# Altium PCB Central_Unit_AgOpenGPS.pcbdoc (part 1 of 4)
Units mm, origin at the board's own origin, x right, y up, seen from the top; angles counter-clockwise.
Board outline 200.19 x 122.57 mm, 2 copper layers (Top Layer, Bottom Layer); 278 components, 223 nets, 1042 pads, 421 vias.
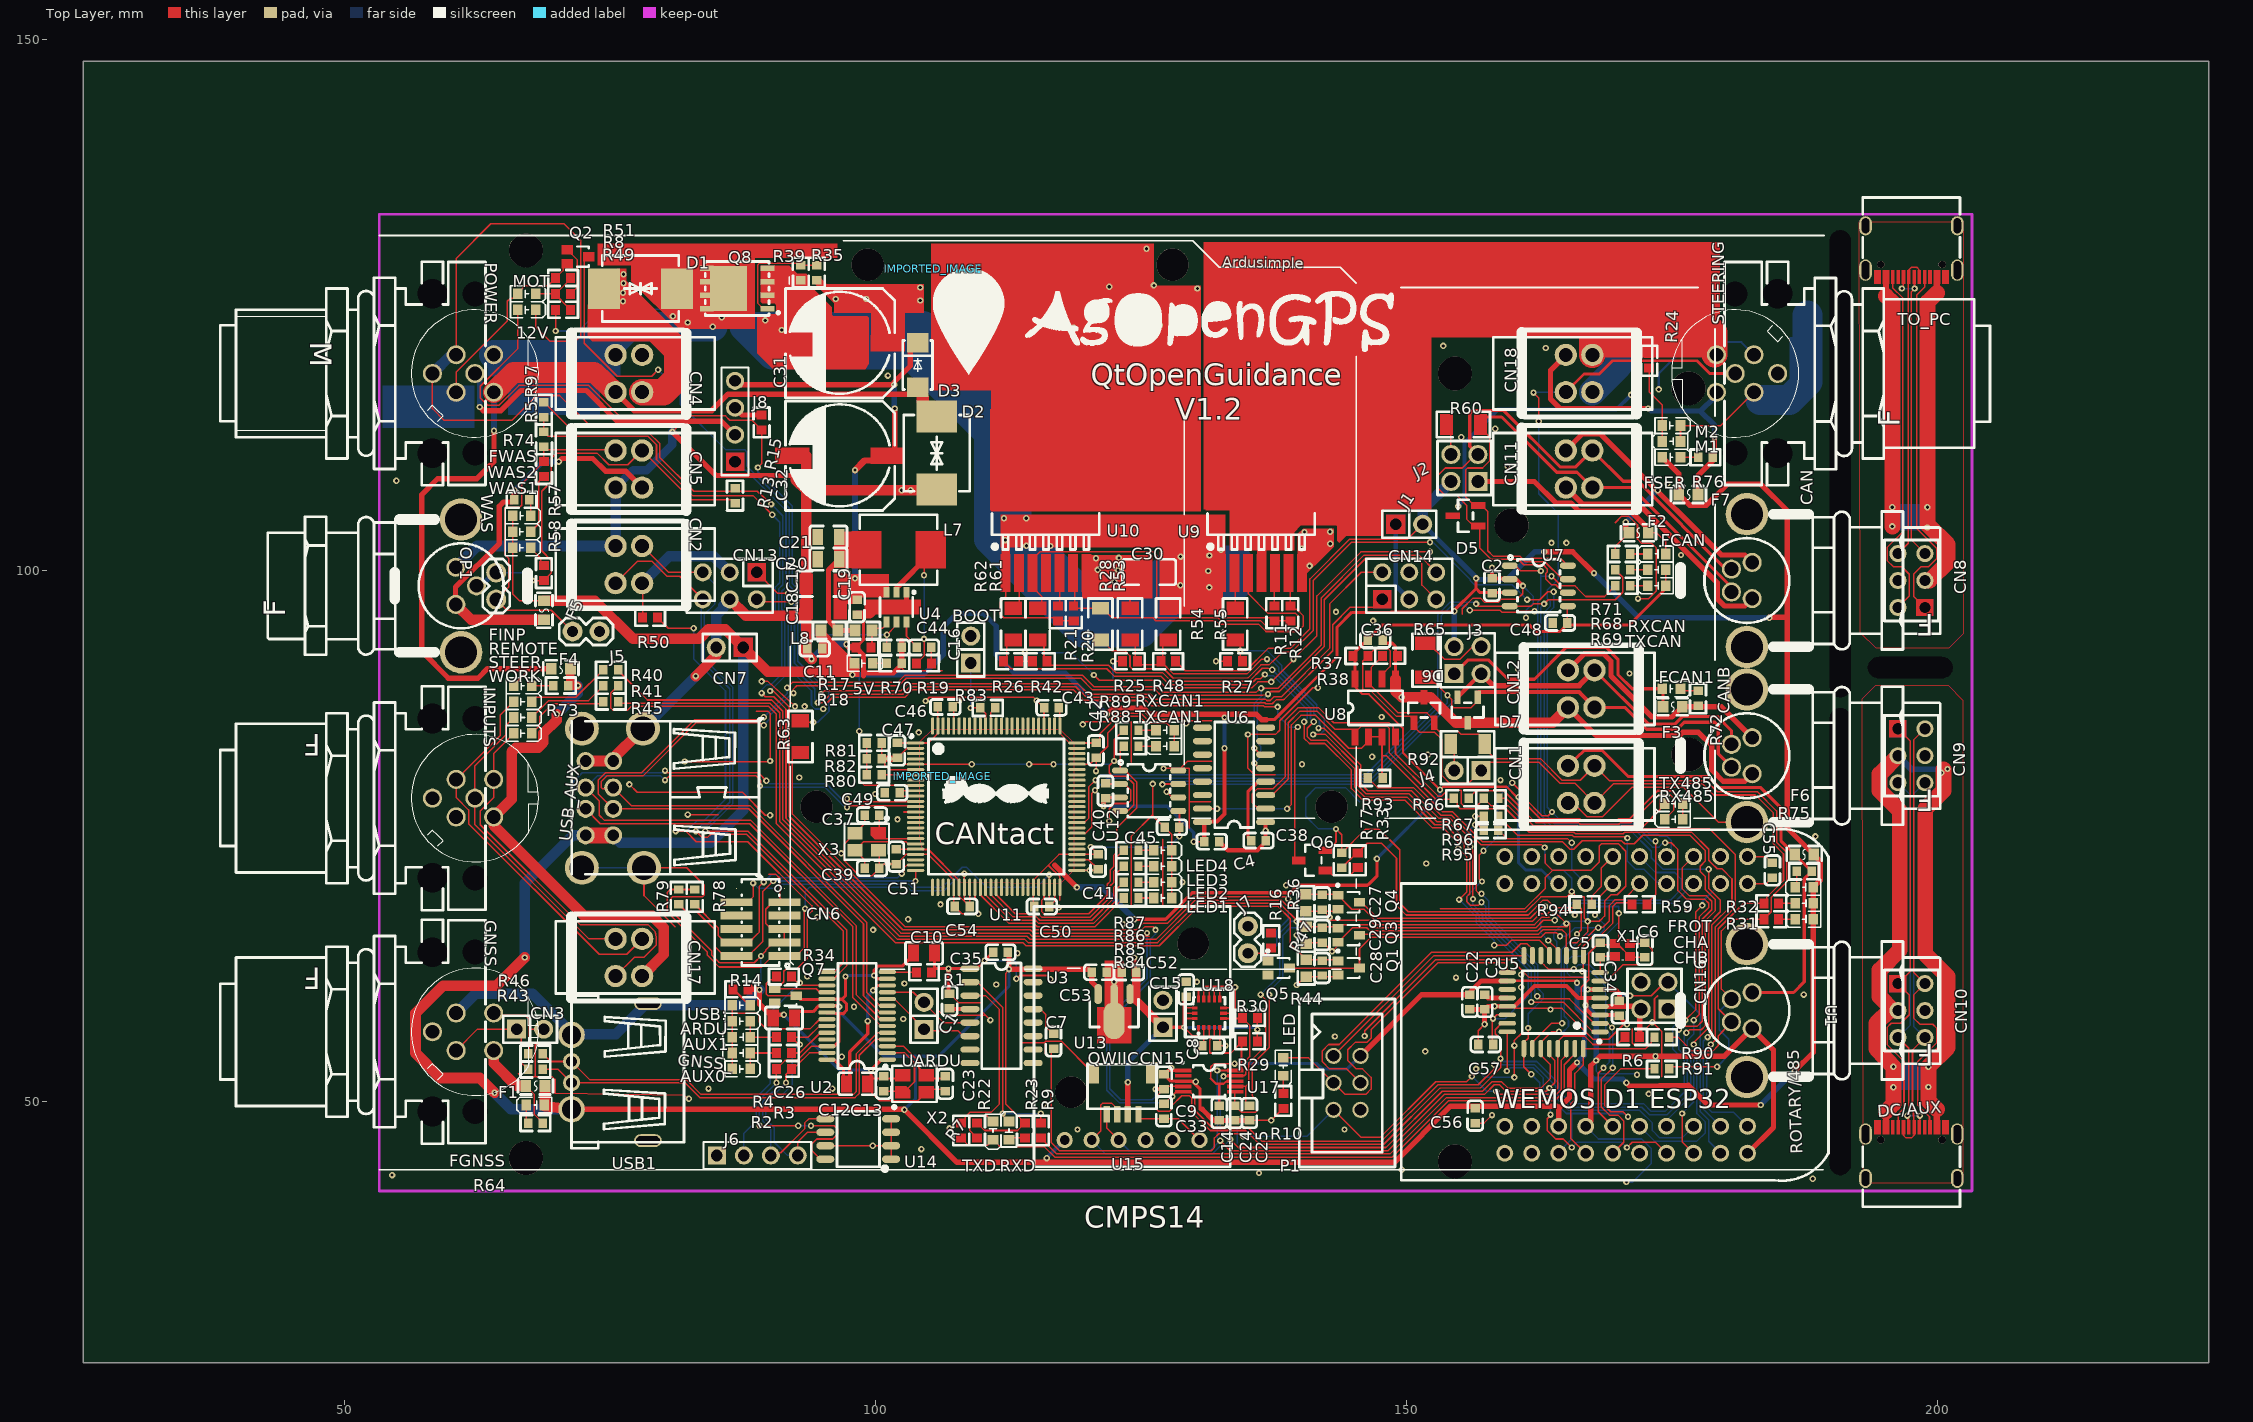
[diagram p0: Top Layer view]
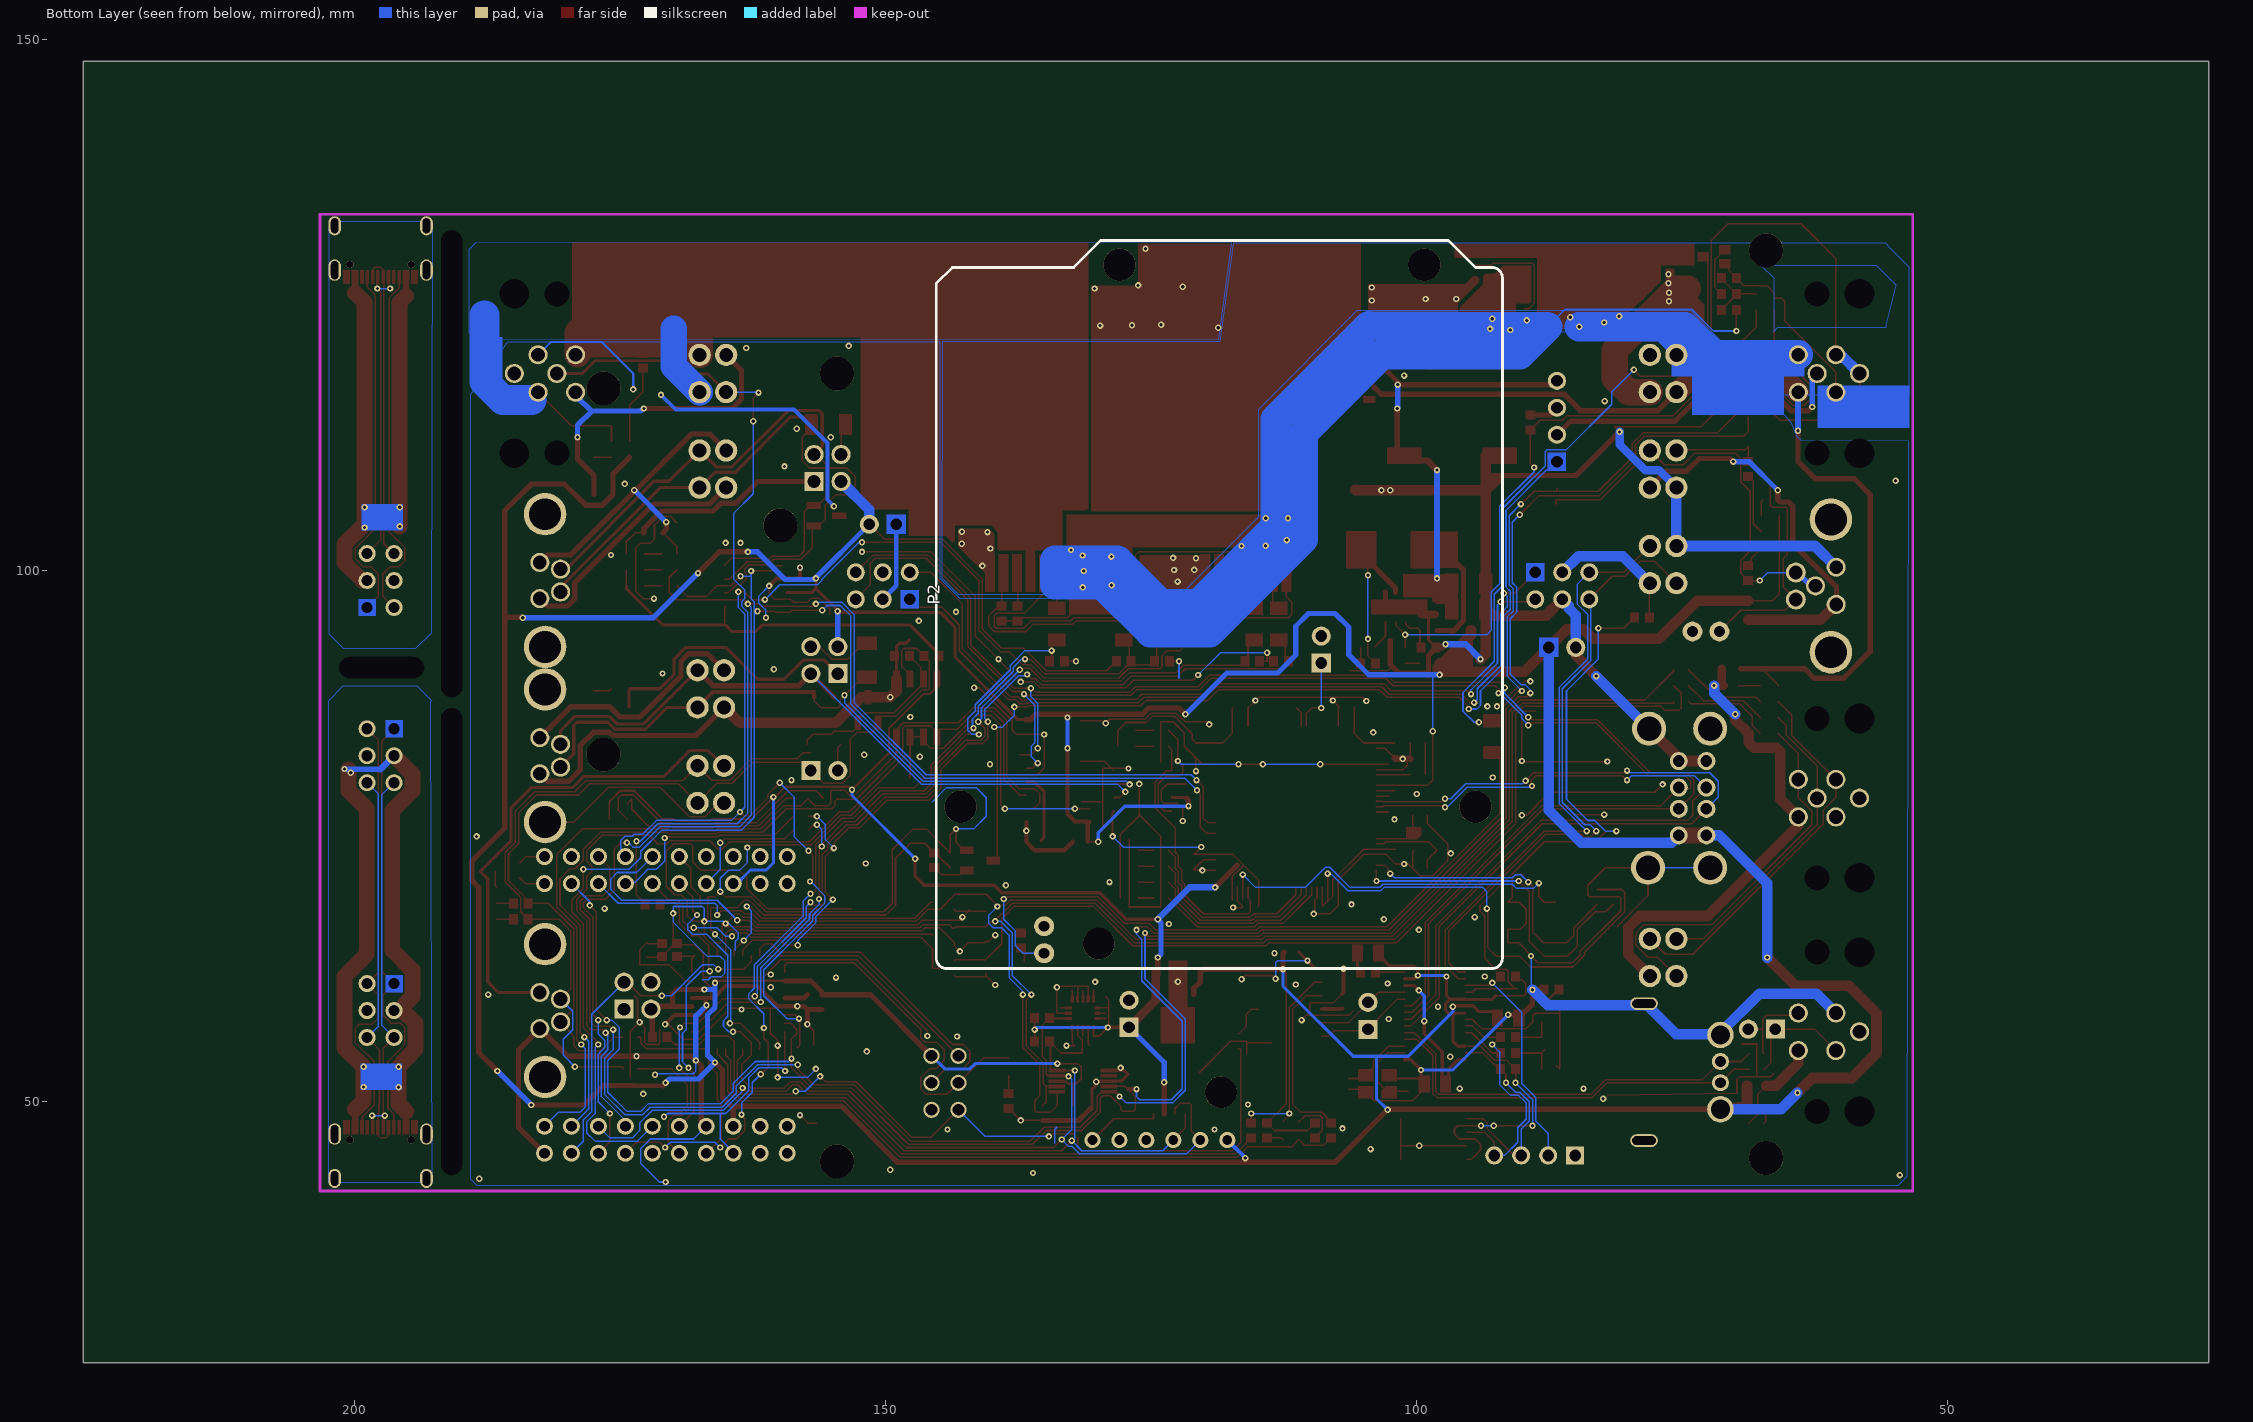
[diagram p1: Bottom Layer view, seen from below]

## Layer stack, top to bottom
Top Layer: signal copper (thickness not stored)
Dielectric: dielectric 0.32, FR-4, Dk 4.8
Bottom Layer: signal copper (thickness not stored)

## Board outline
225.587,25.4 25.4,25.4 25.4,147.973 225.587,147.973

## Components (designator, comment, footprint, x,y, rotation, side; value= is the part's Value field where it differs from the comment)
5V "FC-D1608WD-460H5" LED0603-RD 98.887,91.266 r180 top
12V "FC-D1608WD-460H5" LED0603-RD 67.187,124.566 r180 top
ARDU "FC-D1608UGK-520D10" LED0603-RD 87.387,57.566 r180 top
AUX0 "FC-D1608UGK-520D10" LED0603-RD 87.387,53.066 r180 top
AUX1 "FC-DA1608BK-470H10" LED0603-RD 87.387,56.066 r0 top
BOOT "A2541WV-2P" HDR-TH_P2.54-H-M_A2541WV-2P#1 108.987,92.566 r90 top
C1 "1uF" C0603 106.987,59.466 r270 top
C2 "1uF" C0603 158.087,98.566 r90 top
C3 "100nF" C0603 157.387,59.366 r270 top
C4 "100nF" C0603 131.687,74.466 r0 top
C5 "22pF" C0603 168.287,64.266 r270 top
C6 "22pF" C0603 172.487,64.266 r90 top
C7 "100nF" C0603 116.787,55.666 r90 top
C8 "100nF" C0603 131.487,55.266 r180 top
C9 "100nF" C0603 127.187,51.866 r270 top
C10 "10uF" C0805#1 104.587,63.966 r180 top
C11 "1uF" C0603 94.287,92.666 r180 top
C12 "10uF" C0805#1 98.287,51.666 r180 top
C13 "33pF" C0603 100.787,51.666 r270 top
C14 "1uF" C0603 132.387,48.916 r270 top
C15 "1uF" C0603 129.287,60.566 r90 top
C16 "100nF" C0603 104.587,92.766 r0 top
C17 "10uF" C1206 95.087,98.766 r0 top
C18 "10uF" C1206 95.087,96.366 r0 top
C19 "100nF" C0603 98.287,96.566 r90 top
C20 "22uF" C0805#2 95.587,101.066 r0 top
C21 "22uF" C0805#2 95.587,103.166 r0 top
C22 "1uF" C0603 155.987,59.366 r270 top
C23 "33pF" C0603 106.587,51.666 r270 top
C24 "1nF" C0603 133.839,48.917 r90 top
C25 "1nF" C0603 135.239,48.917 r90 top
C26 "10uF" C0805#1 91.387,57.866 r180 top
C27 "100nF" C0603 142.087,68.766 r90 top
C28 "100nF" C0603 142.087,62.566 r90 top
C29 "100nF" C0603 142.087,65.666 r90 top
C30 "10uF" C1206 125.787,99.866 r180 top
C31 "470uF" CAP-SMD_BD10.0-L10.3-W10.3-FD 96.687,121.416 r180 top
C32 "470uF" CAP-SMD_BD10.0-L10.3-W10.3-FD 96.687,110.816 r180 top
C33 "100nF" C0603 127.187,49.066 r90 top
C34 "1uF" C0603 170.087,58.766 r270 top
C35 "1uF" C0603 111.787,64.066 r180 top
C36 "1uF" C0603 147.087,93.466 r0 top
C37 "33pF" C0603 99.687,76.966 r0 top
C38 "100nF" C0603 136.087,74.566 r0 top
C39 "33pF" C0603 99.687,71.966 r180 top
C40 "1uF" C0603 121.687,79.266 r90 top
C41 "1uF" C0603 120.987,72.566 r90 top
C42 "1uF" C0603 120.787,83.066 r90 top
C43 "1uF" C0603 116.587,87.066 r0 top
C44 "100nF" C0603 101.787,92.766 r180 top
C45 "100nF" C0603 127.937,75.816 r0 top
C46 "1uF" C0603 106.587,87.166 r180 top
C47 "1uF" C0603 102.087,83.066 r90 top
C48 "100nF" C0603 164.487,95.066 r0 top
C49 "1uF" C0603 101.587,79.066 r0 top
C50 "1uF" C0603 115.687,68.366 r180 top
C51 "1uF" C0603 101.987,73.066 r90 top
C52 "1uF" C0603 123.887,62.166 r180 top
C53 "1uF" C0603 121.087,62.166 r0 top
C54 "1uF" C0603 108.187,68.366 r0 top
C55 "100nF" C0603 184.487,71.766 r270 top
C56 "1uF" C0603 156.487,48.666 r270 top
C57 "1nF" C0603 157.487,55.366 r0 top
CAN "M8 4pole female" "M8 FEMALE 4POLE 90°" 182.087,99.066 r90 top
CANB "M8 4pole female" "M8 FEMALE 4POLE 90°" 182.087,82.566 r90 top
CHA "FC-D1608HYK-588J" LED0603-RD 187.487,68.666 r0 top
CHB "FC-D1608HOK-600H" LED0603-RD 187.487,67.166 r0 top
CN1 "4x1 push_in connector" "S2C-SMT 3.50/04/180G 3.5SN BK RL" 166.487,79.866 r270 top
CN2 "4x1 push_in connector" "S2C-SMT 3.50/04/180G 3.5SN BK RL" 76.787,100.566 r90 top
CN3 "A2541WV-2P" HDR-TH_P2.54-H-M_A2541WV-2P#1 67.487,56.816 r0 top
CN4 "4x1 push_in connector" "S2C-SMT 3.50/04/180G 3.5SN BK RL" 76.787,118.566 r90 top
CN5 "4x1 push_in connector" "S2C-SMT 3.50/04/180G 3.5SN BK RL" 76.787,109.566 r90 top
CN6 "1315-1206G0M075CP01" HDR-SMD_12P-P1.27-V-M-R2-C6-S7.50 89.187,66.866 r90 top
CN7 "A2541WV-2P" HDR-TH_P2.54-H-M_A2541WV-2P#2 86.287,92.766 r180 top
CN8 "A2541WV-2X3P" HDR-TH_6P-P2.54-V-R2-C3-S2.54_A2541WV-2X3P 197.587,99.066 r90 top
CN9 "A2541WV-2X3P" HDR-TH_6P-P2.54-V-R2-C3-S2.54_A2541WV-2X3P 197.587,82.566 r270 top
CN10 "A2541WV-2X3P" HDR-TH_6P-P2.54-V-R2-C3-S2.54_A2541WV-2X3P 197.587,58.566 r270 top
CN11 "4x1 push_in connector" "S2C-SMT 3.50/04/180G 3.5SN BK RL" 166.287,109.566 r270 top
CN12 "4x1 push_in connector" "S2C-SMT 3.50/04/180G 3.5SN BK RL" 166.487,88.866 r270 top
CN13 "PM254V-12-06-H85" HDR-TH_6P-P2.54-V-F-R2-C3-S2.54 86.287,98.566 r180 top
CN14 "PM254V-12-06-H85" HDR-TH_6P-P2.54-V-F-R2-C3-S2.54 150.287,98.566 r0 top
CN15 "A2541WV-2P" HDR-TH_P2.54-H-M_A2541WV-2P#1 127.087,58.266 r90 top
CN16 "A2541WV-2X2P" HDR-TH_4P-P2.54-V-R2-C2-S2.54_A2541WV-2X2P 173.387,59.966 r90 top
CN17 "4x1 push_in connector" "S2C-SMT 3.50/04/180G 3.5SN BK RL" 76.787,63.566 r90 top
CN18 "4x1 push_in connector" "S2C-SMT 3.50/04/180G 3.5SN BK RL" 166.287,118.566 r270 top
D1 "SMCJ33CA" SMC_L6.9-W5.9-LS7.9-BI 77.887,126.566 r180 top
D2 "SMCJ15CA" SMC_L6.9-W5.9-LS7.9-BI 105.787,111.066 r90 top
D3 "SS54_C22452" SMA_L4.4-W2.8-LS5.4-R-RD 103.987,119.366 r270 top
D5 "CDSOT23-T24CAN" SOT-23_L2.9-W1.3-P0.95-LS2.4-BR#1 155.587,105.166 r0 top
D6 "CDSOT23-T24CAN" SOT-23_L2.9-W1.3-P0.95-LS2.4-BR#1 151.687,86.866 r270 top
D7 "CDSOT23-T24CAN" SOT-23_L2.9-W1.3-P0.95-LS2.4-BR#2 155.787,86.866 r90 top
DC/AUX "KH-TYPE-C-16P" USB-C-SMD_KH-TYPE-C-16P#1 197.587,45.166 r0 top
F1 "BSMD0603-050-6V" F0603 67.987,51.466 r0 top
F2 "BSMD0603-050-6V" F0603 171.887,103.566 r180 top
F3 "BSMD0603-050-6V" F0603 175.087,87.166 r0 top
F4 "BSMD0603-050-6V" F0603 70.387,90.766 r0 top
F5 "BSMD0603-050-6V" F0603 68.787,96.266 r270 top
F6 "BSMD0603-050-6V" F0603 187.487,73.266 r180 top
F7 "BSMD0603-050-6V" F0603 176.587,107.166 r0 top
FCAN "FC-DA1608HRK-620D" LED0603-FD 173.587,101.566 r180 top
FCAN1 "FC-DA1608HRK-620D" LED0603-FD 174.988,88.867 r0 top
FGNSS "FC-DA1608HRK-620D" LED0603-FD 67.987,49.666 r180 top
FINP "FC-DA1608HRK-620D" LED0603-FD 66.787,89.166 r0 top
FROT "FC-DA1608HRK-620D" LED0603-FD 187.487,70.166 r180 top
FSER "FC-DA1608HRK-620D" LED0603-FD 174.987,110.666 r0 top
FWAS "FC-DA1608HRK-620D" LED0603-FD 66.687,105.166 r0 top
GNSS "M12 4pole female" "M12-D FEMALE 4POLE 90°" 62.287,56.566 r90 top
GNSS_ "FC-DA1608BK-470H10" LED0603-RD 87.387,54.566 r0 top
IMPORTED_IMAGE "IMPORTED_IMAGE" IMPORTED_IMAGE 106.327,80.618 r0 top
IMPORTED_IMAGE "IMPORTED_IMAGE" IMPORTED_IMAGE 105.442,128.45 r0 top
INPUTS "M12A 5pole female" "M12-A FEMALE 4-5POLE 90°" 62.287,78.566 r90 top
J1 "A2541WV-2P" HDR-TH_P2.54-H-M_A2541WV-2P#2 150.287,104.366 r0 top
J2 "A2541WV-2X2P" HDR-TH_4P-P2.54-V-R2-C2-S2.54_A2541WV-2X2P 155.487,109.666 r90 top
J3 "A2541WV-2X2P" HDR-TH_4P-P2.54-V-R2-C2-S2.54_A2541WV-2X2P 155.787,91.566 r0 top
J4 "A2541WV-2P" HDR-TH_P2.54-H-M_A2541WV-2P#1 155.787,81.166 r180 top
J5 "Option single ended WAS" 1X02#1 71.487,94.266 r0 top
J6 "A2541WV-4P" HDR-TH_4P-P2.54-V#1 88.887,44.916 r0 top
J7 "Option" 1X02#1 135.087,63.966 r90 top
J8 "A2541WV-4P" HDR-TH_4P-P2.54-V#2 86.787,114.066 r90 top
L7 "5.6uH" IND-SMD_L7.3-W6.6_MHCI06030 102.187,101.966 r180 top
L8 "0" R0603#1 95.687,94.366 r180 top
LED "FC-DA1608HRK-620D" LED0603-FD 138.43,53.259 r270 top
LED1 "FC-D1608UGK-520D10" LED0603-RD 127.087,69.166 r180 top
LED2 "FC-DA1608BK-470H10" LED0603-RD 127.087,70.666 r180 top
LED3 "FC-D1608UGK-520D10" LED0603-RD 127.087,72.166 r180 top
LED4 "FC-DA1608BK-470H10" LED0603-RD 127.087,73.666 r180 top
M1 "FC-D1608HYK-588J" LED0603-RD 174.987,112.166 r0 top
M2 "FC-D1608HOK-600H" LED0603-RD 174.987,113.666 r180 top
MOT "FC-D1608WD-460H5" LED0603-RD 67.187,126.066 r180 top
OP1 "Option M8 4pole" 1X02#2 64.287,99.816 r270 top
P1 "HDR-IDC-2.54-2X3P" IDC-TH_6P-P2.54_C11214 144.429,51.758 r270 top
P2 "Ardusimple RTK2B Board" ARDUSIMPLE_MECH 118.587,103.666 r270 bottom
POWER "M12A 5pole male" "M12-A MALE 4-5POLE 90°" 62.287,118.566 r90 top
Q1 "2N7002WT1G" SOT-323-3_L2.0-W1.3-P1.30-LS2.1-BR 144.587,62.566 r180 top
Q2 "BC856BW,115" SOT-323-3_L2.2-W1.3-P1.30-LS2.2-BR#1 71.987,129.566 r180 top
Q3 "2N7002WT1G" SOT-323-3_L2.0-W1.3-P1.30-LS2.1-BR 144.587,65.666 r180 top
Q4 "2N7002WT1G" SOT-323-3_L2.0-W1.3-P1.30-LS2.1-BR 144.587,68.766 r180 top
Q5 "2N7002WT1G" SOT-323-3_L2.0-W1.3-P1.30-LS2.1-BR 137.987,62.566 r180 top
Q6 "ZXMS6004FFTA" SOT-23-3_L2.9-W1.6-P1.90-LS2.8-BR 141.137,72.716 r0 top
Q7 "BC856BW,115" SOT-323-3_L2.2-W1.3-P1.30-LS2.2-BR#2 91.537,59.966 r180 top
Q8 "HSBA4048" POWERPAK-SO-8_L6.2-W5.2-P1.27-BR-EP 86.987,126.566 r0 top
QWIIC "QWIIC SMD JST" "QWIIC CONNECTOR" 123.587,49.616 r180 top
R1 "2.7k" R0603#2 104.587,62.166 r180 top
R2 "10K" R0603#2 91.387,53.066 r180 top
R3 "1K" R0603#2 91.387,54.566 r180 top
R4 "1K" R0603#2 91.387,56.066 r0 top
R5 "2k2" R0603#3 68.787,112.366 r270 top
R6 "1K" R0603#2 171.287,56.066 r0 top
R7 "1K" R0603#2 108.087,47.266 r270 top
R8 "10K" R0603#2 70.587,126.066 r0 top
R9 "1K" R0603#2 115.587,47.266 r90 top
R10 "1K" R0603#2 138.429,50.058 r90 top
R11 "1K" R0603#2 137.587,95.966 r90 top
R12 "1K" R0603#2 139.087,95.966 r90 top
R13 "2k2" R0603#3 86.787,107.066 r270 top
R14 "1K" R0603#2 87.287,60.566 r180 top
R15 "10K" R0603#2 89.287,113.966 r90 top
R16 "10K" R0603#2 137.287,65.166 r90 top
R17 "51K" R0603#1 98.887,94.366 r180 top
R18 "10K" R0603#2 98.887,92.766 r0 top
R19 "10" R0603#2 104.587,91.266 r0 top
R20 "1K" R0603#2 118.687,95.966 r270 top
R21 "1K" R0603#2 117.187,95.966 r270 top
R22 "1K" R0603#2 109.587,47.266 r90 top
R23 "1K" R0603#2 114.087,47.266 r90 top
R24 "2.7k" R0603#2 172.887,119.766 r90 top
R25 "2k2" R0603#2 123.987,91.466 r180 top
R26 "2k2" R0603#2 112.787,91.466 r0 top
R27 "2k2" R0603#2 133.887,91.466 r180 top
R28 "8.2K" RES-SMD_L3.5-W1.5#1 121.187,94.966 r90 top
R29 "1K" R0603#2 135.287,55.666 r0 top
R30 "1K" R0603#2 135.287,57.866 r0 top
R31 "1K" R0603#2 184.387,67.166 r0 top
R32 "1K" R0603#2 184.387,68.666 r0 top
R33 "10K" R0603#2 145.437,72.716 r90 top
R34 "10K" R0603#2 91.387,61.766 r180 top
R35 "10K" R0603#3 94.487,128.066 r90 top
R36 "560" R0603#1 140.53,68.715 r90 top
R37 "1K" R0603#2 145.687,91.966 r180 top
R38 "1K" R0603#2 148.487,91.966 r0 top
R39 "10K" R0603#3 92.987,128.066 r90 top
R40 "2k2" R0603#3 75.087,90.666 r0 top
R41 "2k2" R0603#3 75.087,89.166 r0 top
R42 "2k2" R0603#2 115.487,91.466 r180 top
R43 "10" R0603#3 67.987,53.016 r0 top
R44 "560" R0603#1 140.587,62.566 r90 top
R45 "2k2" R0603#3 75.087,87.666 r0 top
R46 "10" R0603#3 67.987,54.516 r0 top
R47 "560" R0603#1 140.587,65.666 r90 top
R48 "10K" R0603#2 127.587,91.466 r180 top
R49 "10K" R0603#2 70.587,124.566 r0 top
R50 "10K" R0603#2 78.787,95.566 r0 top
R51 "10K" R0603#2 70.587,127.566 r180 top
R53 "8.2K" RES-SMD_L3.5-W1.5#2 123.987,94.966 r90 top
R54 "8.2K" RES-SMD_L3.5-W1.5#2 127.587,94.966 r90 top
R55 "8.2K" RES-SMD_L3.5-W1.5#2 133.887,94.966 r90 top
R57 "1K" R0603#2 68.787,109.566 r270 top
R58 "1K" R0603#2 68.787,99.766 r90 top
R59 "1K" R0603#2 171.987,68.566 r0 top
R60 "120" R1206#1 155.387,113.766 r180 top
R61 "8.2K" RES-SMD_L3.5-W1.5#2 115.287,94.966 r90 top
R62 "8.2K" RES-SMD_L3.5-W1.5#2 112.987,94.966 r270 top
R63 "8.2K" RES-SMD_L3.5-W1.5#2 92.937,84.366 r270 top
R64 "1K" R0603#3 67.987,47.966 r0 top
R65 "120" R1206#1 151.787,91.566 r90 top
R66 "1K" R0603#3 155.187,78.566 r180 top
R67 "1K" R0603#3 157.987,78.566 r180 top
R68 "1K" R0603#3 170.387,100.066 r180 top
R69 "1K" R0603#3 170.387,98.566 r180 top
R70 "10K" R0603#3 101.787,91.266 r180 top
R71 "2.7k" R0603#3 170.387,101.566 r180 top
R72 "2.7k" R0603#3 177.487,87.966 r270 top
R73 "10K" R0603#3 70.387,89.166 r0 top
R74 "10K" R0603#3 66.687,106.666 r180 top
R75 "1K" R0603#3 187.487,71.666 r0 top
R76 "1K" R0603#3 178.187,110.666 r180 top
R77 "10K" R0603#3 143.937,72.716 r90 top
R78 "10K" R0603#3 82.987,69.266 r270 top
R79 "10K" R0603#3 81.487,69.266 r270 top
R80 "10K" R0603#3 99.887,80.766 r180 top
R81 "2.7k" R0603#3 99.887,83.766 r0 top
R82 "10K" R0603#3 99.887,82.266 r0 top
R83 "10" R0603#3 110.587,87.066 r0 top
R84 "1K" R0603#3 124.087,69.166 r180 top
R85 "1K" R0603#3 124.087,70.666 r180 top
R86 "1K" R0603#3 124.087,72.166 r180 top
R87 "1K" R0603#3 124.087,73.666 r180 top
R88 "1K" R0603#3 124.087,83.466 r180 top
R89 "1K" R0603#3 124.087,84.966 r180 top
R90 "1K" R0603#3 174.087,56.066 r180 top
R91 "1K" R0603#3 174.087,53.066 r180 top
R92 "120" R1206#2 155.787,83.666 r0 top
R93 "10K" R0603#3 147.087,80.466 r180 top
R94 "1K" R0603#3 166.787,68.566 r180 top
R95 "1K" R0603#3 157.987,75.566 r180 top
R96 "1K" R0603#3 157.987,76.866 r180 top
R97 "10" R0603#3 68.787,115.166 r90 top
REMOTE "FC-D1608HYK-588J" LED0603-RD 66.787,87.666 r180 top
ROTARY/485 "M8 4pole female" "M8 FEMALE 4POLE 90°" 182.087,58.566 r90 top
RX485 "FC-D1608UGK-520D10" LED0603-RD 175.187,76.566 r0 top
RXCAN "FC-D1608UGK-520D10" LED0603-RD 173.587,100.066 r0 top
RXCAN1 "FC-D1608UGK-520D10" LED0603-RD 127.287,84.966 r0 top
RXD "FC-D1608UGK-520D10" LED0603-RD 112.587,47.266 r270 top
STEER "FC-D1608HYK-588J" LED0603-RD 66.787,86.166 r180 top
STEERING "M12A 5pole female" "M12-A FEMALE 4-5POLE 90°" 180.987,118.566 r270 top
TO_PC "KH-TYPE-C-16P" USB-C-SMD_KH-TYPE-C-16P#2 197.587,130.066 r180 top
TX485 "FC-DA1608BK-470H10" LED0603-RD 175.187,78.066 r0 top
TXCAN "FC-DA1608BK-470H10" LED0603-RD 173.587,98.566 r0 top
TXCAN1 "FC-DA1608BK-470H10" LED0603-RD 127.287,83.466 r0 top
TXD "FC-DA1608BK-470H10" LED0603-RD 111.087,47.266 r90 top
U1 "TG_WEMOS_D1_ESP32(CLONE)" "WEMOS-D1 ESP32" 184.687,73.066 r270 top
U2 "FE1.1S" SSOP-28_L9.9-W3.9-P0.64-LS6.0-BL 98.287,58.066 r90 top
U3 "CH340B" SOIC-16_L9.9-W3.9-P1.27-LS6.0-BL 111.887,58.066 r270 top
U4 "TPS56339" SOT-23-6_L2.9-W1.6-P0.95-LS2.8-BL 101.987,96.566 r180 top
U5 "ATMEGA328P-AU" TQFP-32_L7.0-W7.0-P0.80-LS9.0-BL 163.887,59.366 r90 top
U6 "CH340B" SOIC-16_L9.9-W3.9-P1.27-LS6.0-BL 133.787,80.766 r90 top
U7 "TJA1051T/3/1J" SOIC-8_L4.9-W3.9-P1.27-LS6.0-BL 162.487,98.566 r270 top
U8 "KY3485LEEN" SO-8_L4.9-W3.9-P1.27-LS5.9-BL 147.087,87.066 r0 top
U9 "BTN8982TAAUMA1" TO-263-7_L10.2-W10.4-P1.27-LS14.4-B 136.387,105.116 r270 top
U10 "BTN8982TAAUMA1" TO-263-7_L10.2-W10.4-P1.27-LS14.4-B 116.087,105.116 r270 top
U11 "LPC54616J512BD100" TQFP-100_14X14X05P 105.387,85.366 r0 top
U12 "TJA1051T/3/1J" SOIC-8_L4.9-W3.9-P1.27-LS6.0-BL 125.787,79.266 r270 top
U13 "UR133AG-33-AB3-B-R" SOT-89_L4.5-W2.5-P1.50-LS4.2-BR 122.487,58.866 r90 top
U14 "M24C02-WMN6TP" SOP-8_L5.0-W4.0-P1.27-LS6.2-BL 98.387,46.467 r90 top
U15 "CMPS14" CMPS14 114.937,43.866 r90 top
U17 "ADS1115IDGSR" MSOP-10_L3.0-W3.0-P0.50-LS5.0-BL 131.439,51.917 r270 top
U18 "MMA8452QR1_C11360" QFN-16_L3.0-W3.0-P0.50-TL_MMA8452QR1 131.439,58.317 r90 top
UARDU "A2541WV-2P" HDR-TH_P2.54-H-M_A2541WV-2P#1 104.588,58.067 r90 top
USB1 "A/F90_C109354" USB-A-TH_USB-A-F-2 74.987,52.766 r90 top
USB: "FC-D1608UGK-520D10" LED0603-RD 87.387,59.066 r180 top
USB_AUX "Double layer DIP 90° white" USB-A-TH_USB-M-51 75.286,78.566 r90 top
WAS "M8 3pole female" "M8 FEMALE 3POLE 90°" 60.987,98.566 r270 top
WAS1 "FC-D1608HYK-588J" LED0603-RD 66.687,102.166 r180 top
WAS2 "FC-D1608HOK-600H" LED0603-RD 66.687,103.666 r180 top
WORK "FC-D1608HYK-588J" LED0603-RD 66.787,84.666 r180 top
X1 "16MHz" OSC-SMD_4P-L2.0-W1.6-BL 170.387,64.266 r0 top
X2 "12MHz" OSC-SMD_4P-L3.2-W2.5-BL#1 103.687,51.666 r0 top
X3 "12MHz" OSC-SMD_4P-L3.2-W2.5-BL#2 99.187,74.466 r180 top

## Footprints (in the part's own frame and the unit in brackets; to place one, negate y for a bottom-side part, rotate by r counter-clockwise, add the part's x,y. Pads: shape width x height; smd on the part's side, far side on the other; paste and mask are expansions set on the pad)
1X02#1 [mil]
  round 74 hole 40: 1(0,0) 2(100,0)
  silkscreen extent -50,-50 150,50
1X02#2 [mil]
  round 74 hole 51.18: 1(0,0) 2(100,0)
  silkscreen extent -50,-50 150,50
ARDUSIMPLE_MECH [mil]
  round 120 hole 120 unplated: ""(-990,-370) ""(-990,760) ""(1020,-960) ""(1020,950)
  silkscreen extent -1080,-1050 1620,1050
C0603 [mm]
  rect 0.8x0.9 smd: 1(-0.7,0) 2(0.7,0)
  silkscreen extent -1.4,-0.7 1.4,0.72
C0805#1 [mm]
  round 0 smd: 1(-1,0) 2(1,0)
  Top Layer region: -1.5,0.775 -0.5,0.775 -0.5,-0.775 -1.5,-0.775
  Top Layer region: 0.5,0.775 1.5,0.775 1.5,-0.775 0.5,-0.775
  silkscreen extent -1.75,-1.04 1.75,1.04
C0805#2 [mm]
  rect 1x1.55 smd: 1(-1,0) 2(1,0)
  silkscreen extent -1.75,-1.04 1.75,1.04
C1206 [mm]
  round 0 smd: 1(-1.6,0) 2(1.6,0)
  Top Layer region: -2.2,0.95 -1,0.95 -1,-0.95 -2.2,-0.95
  Top Layer region: 1,0.95 2.2,0.95 2.2,-0.95 1,-0.95
  silkscreen extent -2.5,-1.2 2.5,1.2
CAP-SMD_BD10.0-L10.3-W10.3-FD [mm]
  round 0 smd: 1(-4.5,0) 2(4.5,0)
  Top Layer region: -2.9,-0.75 -6.1,-0.75 -6.1,0.75 -2.9,0.75
  Top Layer region: 6.1,-0.75 2.9,-0.75 2.9,0.75 6.1,0.75
  silkscreen extent -5.15,-5.15 5.15,5.15
CMPS14 [mm]
  round 1.524 hole 0.914: 1(2.5,-2.9) 2(2.5,-5.44) 3(2.5,-7.98) 4(2.5,-10.52) 5(2.5,-13.06) 6(2.5,-15.6)
  round 3 hole 3 unplated: ""(7,-3.5) ""(21,-15)
  silkscreen extent 0,-18.5 24.5,0
F0603 [mm]
  rect 1x1.1 smd: 1(-0.9,0) 2(0.9,0)
  silkscreen extent -1.65,-0.8 1.65,0.8
HDR-SMD_12P-P1.27-V-M-R2-C6-S7.50 [mm]
  rect 0.74x3 smd: 1(-3.175,-2.25) 2(-3.175,2.25) 3(-1.905,-2.25) 4(-1.905,2.25) 5(-0.635,-2.25) 6(-0.635,2.25) 7(0.635,-2.25) 8(0.635,2.25) 9(1.905,-2.25) 10(1.905,2.25)
  rect 0.1x0.1 smd: 11(3.175,-2.25) 12(3.175,2.25)
  silkscreen extent -4.24,-2.72 4.06,1.78
HDR-TH_4P-P2.54-V#1 [mm]
  rect 1.7x1.7 hole 1.1: 1(-3.81,0)
  round 1.7 hole 1.1: 2(-1.27,0) 3(1.27,0) 4(3.81,0)
  silkscreen extent -5.08,-1.27 5.08,1.27
HDR-TH_4P-P2.54-V#2 [mm]
  round 0 hole 1.1: 1(-3.81,0)
  round 1.7 hole 1.1: 2(-1.27,0) 3(1.27,0) 4(3.81,0)
  Top Layer region: -4.66,0.85 -2.96,0.85 -2.96,-0.85 -4.66,-0.85
  Bottom Layer region: -4.66,0.85 -2.96,0.85 -2.96,-0.85 -4.66,-0.85
  silkscreen extent -5.08,-1.27 5.08,1.27
HDR-TH_4P-P2.54-V-R2-C2-S2.54_A2541WV-2X2P [mm]
  rect 1.8x1.8 hole 1.2: 1(-1.27,-1.27)
  round 1.8 hole 1.2: 2(-1.27,1.27) 3(1.27,-1.27) 4(1.27,1.27)
  silkscreen extent -2.54,-2.54 2.54,2.54
HDR-TH_6P-P2.54-V-F-R2-C3-S2.54 [mm]
  round 0 hole 1.1: 1(-2.54,-1.27)
  round 1.7 hole 1.1: 2(-2.54,1.27) 3(0,-1.27) 4(0,1.27) 5(2.54,-1.27) 6(2.54,1.27)
  Top Layer region: -3.39,-0.42 -1.69,-0.42 -1.69,-2.12 -3.39,-2.12
  Bottom Layer region: -3.39,-0.42 -1.69,-0.42 -1.69,-2.12 -3.39,-2.12
  silkscreen extent -4.04,-2.54 4.04,2.54
HDR-TH_6P-P2.54-V-R2-C3-S2.54_A2541WV-2X3P [mm]
  round 0 hole 1.05: 1(-2.54,-1.27)
  round 1.6 hole 1.05: 2(-2.54,1.27) 3(0,-1.27) 4(0,1.27) 5(2.54,-1.27) 6(2.54,1.27)
  Top Layer region: -3.34,-0.47 -1.74,-0.47 -1.74,-2.07 -3.34,-2.07
  Bottom Layer region: -3.34,-0.47 -1.74,-0.47 -1.74,-2.07 -3.34,-2.07
  silkscreen extent -3.81,-2.54 3.81,2.54
HDR-TH_P2.54-H-M_A2541WV-2P#1 [mm]
  rect 1.8x1.8 hole 1.1: 1(-1.27,0)
  round 1.8 hole 1.1: 2(1.27,0)
  silkscreen extent -2.54,-1.27 2.54,1.27
HDR-TH_P2.54-H-M_A2541WV-2P#2 [mm]
  round 0 hole 1.1: 1(-1.27,0)
  round 1.8 hole 1.1: 2(1.27,0)
  Top Layer region: -2.17,0.9 -0.37,0.9 -0.37,-0.9 -2.17,-0.9
  Bottom Layer region: -2.17,0.9 -0.37,0.9 -0.37,-0.9 -2.17,-0.9
  silkscreen extent -2.54,-1.27 2.54,1.27
IDC-TH_6P-P2.54_C11214 [mil]
  round 60 hole 43.3: 1(-100,-50) 2(-100,50) 3(0,-50) 4(0,50) 5(100,-50) 6(100,50)
  silkscreen extent -311,-177 312,178
IMPORTED_IMAGE [mm]
  silkscreen extent 0,-2.57 10,0
IND-SMD_L7.3-W6.6_MHCI06030 [mm]
  round 0 smd: 1(-3.025,0) 2(3.025,0)
  Top Layer region: -4.425,1.75 -1.625,1.75 -1.625,-1.75 -4.425,-1.75
  Top Layer region: 1.625,1.75 4.425,1.75 4.425,-1.75 1.625,-1.75
  silkscreen extent -3.65,-3.3 3.65,3.3
LED0603-FD [mm]
  rect 0.9x1 smd: 1(-0.85,0) 2(0.85,0)
  silkscreen extent -1.55,-0.75 1.75,0.75
LED0603-RD [mm]
  rect 0.9x1 smd: 1(-0.85,0) 2(0.85,0)
  silkscreen extent -1.75,-0.75 1.55,0.75
"M8 FEMALE 3POLE 90°" [mm]
  round 1.8 hole 1.3: 1(1.75,-0.5) 3(-1.75,-0.5) 4(0,1.45)
  round 4 hole 3: Shield(-6.25,0) Shield(6.25,0)
  silkscreen extent -6.5,-18.2 6.5,6.25
"M8 FEMALE 4POLE 90°" [mm]
  round 1.8 hole 1.3: 1(1.7,-0.5) 2(1.075,1.45) 3(-1.7,-0.5) 4(-1.075,1.45)
  round 4 hole 3: Shield(-6.25,0) Shield(6.25,0)
  silkscreen extent -6.5,-18.2 6.5,6.25
"M12-A FEMALE 4-5POLE 90°" [mm]
  round 1.8 hole 1.3: 1(1.768,-1.768) 2(-1.768,-1.768) 3(-1.768,1.768) 4(1.768,1.768) 5(0,0) Shield(0,4)
  round 1 hole 2.35 unplated: ""(-7.5,0) ""(7.5,0)
  round 2.35 hole 2.8 unplated: ""(-7.5,4) ""(7.5,4)
  silkscreen extent -10.54,-6 10.54,24
"M12-A MALE 4-5POLE 90°" [mm]
  round 1.8 hole 1.3: 1(-1.768,-1.768) 2(1.768,-1.768) 3(1.768,1.768) 4(-1.768,1.768) 5(0,0) Shield(0,4)
  round 1 hole 2.35 unplated: ""(-7.5,0) ""(7.5,0)
  round 2.35 hole 2.8 unplated: ""(-7.5,4) ""(7.5,4)
  silkscreen extent -10.54,-6 10.54,24
"M12-D FEMALE 4POLE 90°" [mm]
  round 1.8 hole 1.3: 1(1.768,-1.768) 2(-1.768,-1.768) 3(-1.768,1.768) 4(1.768,1.768) Shield(0,4)
  round 1 hole 2.35 unplated: ""(-7.5,0) ""(7.5,0)
  round 2.35 hole 2.8 unplated: ""(-7.5,4) ""(7.5,4)
  silkscreen extent -10.54,-6 10.54,24
MSOP-10_L3.0-W3.0-P0.50-LS5.0-BL [mil]
  round 0 smd: 1(-39.37,-96.5) 2(-19.68,-96.5) 3(0,-96.5) 4(19.69,-96.5) 5(39.37,-96.5) 6(39.37,96.5) 7(19.69,96.5) 8(0,96.5) 9(-19.68,96.5) 10(-39.37,96.5)
  Top Layer region: -45.37,-126.03 -45.37,-66.97 -33.37,-66.97 -33.37,-126.03
  Top Layer region: -25.68,-126.03 -25.68,-66.97 -13.68,-66.97 -13.68,-126.03
  Top Layer region: -6,-126.03 -6,-66.97 6,-66.97 6,-126.03
  Top Layer region: 13.69,-126.03 13.69,-66.97 25.69,-66.97 25.69,-126.03
  Top Layer region: 33.37,-126.03 33.37,-66.97 45.37,-66.97 45.37,-126.03
  Top Layer region: 33.37,66.97 33.37,126.03 45.37,126.03 45.37,66.97
  Top Layer region: 13.69,66.97 13.69,126.03 25.69,126.03 25.69,66.97
  Top Layer region: -6,66.97 -6,126.03 6,126.03 6,66.97
  Top Layer region: -25.68,66.97 -25.68,126.03 -13.68,126.03 -13.68,66.97
  Top Layer region: -45.37,66.97 -45.37,126.03 -33.37,126.03 -33.37,66.97
  silkscreen extent -74,-103 59,59
OSC-SMD_4P-L2.0-W1.6-BL [mm]
  round 0 smd: 1(-0.7,-0.6) 2(0.7,-0.6) 3(0.7,0.6) 4(-0.7,0.6)
  Top Layer region: -1.15,1 -0.25,1 -0.25,0.2 -1.15,0.2
  Top Layer region: 0.25,1 1.15,1 1.15,0.2 0.25,0.2
  Top Layer region: 0.25,-0.2 1.15,-0.2 1.15,-1 0.25,-1
  Top Layer region: -1.15,-0.2 -0.25,-0.2 -0.25,-1 -1.15,-1
  silkscreen extent -1.3,-1.37 1.3,0.9
OSC-SMD_4P-L3.2-W2.5-BL#1 [mil]
  round 0 smd: 1(-43.31,-31.5) 2(43.31,-31.5) 3(43.31,31.5) 4(-43.31,31.5)
  Top Layer region: 15.75,54.14 70.86,54.14 70.86,8.87 15.75,8.87
  Top Layer region: -70.87,-8.86 -30,-8.86 -15.75,-23.78 -15.75,-54.13 -70.87,-54.13
  Top Layer region: -70.87,54.14 -15.75,54.14 -15.75,8.87 -70.87,8.87
  Top Layer region: 15.75,-8.86 70.86,-8.86 70.86,-54.13 15.75,-54.13
  silkscreen extent -83,-93 83,67
OSC-SMD_4P-L3.2-W2.5-BL#2 [mil]
  round 0 smd: 1(-43.31,-31.5)
  rect 55.12x45.28 smd: 2(43.31,-31.5) 3(43.31,31.5) 4(-43.31,31.5)
  Top Layer region: -70.87,-8.86 -30,-8.86 -15.75,-23.78 -15.76,-54.14 -70.87,-54.14
  silkscreen extent -83,-93 83,67
POWERPAK-SO-8_L6.2-W5.2-P1.27-BR-EP [mm]
  rect 1.3x0.5 smd: 1(2.858,-1.905) 2(2.858,-0.635) 3(2.858,0.635) 4(2.858,1.905) 5(-2.858,1.905) 6(-2.858,0.635) 7(-2.858,-0.635) 8(-2.858,-1.905)
  rect 3.5x4.25 smd: 8(-0.813,0)
  silkscreen extent -3,-2.54 4,2.54
QFN-16_L3.0-W3.0-P0.50-TL_MMA8452QR1 [mm]
  round 0 smd: 1(-1.35,1) 2(-1.35,0.5) 3(-1.35,0) 4(-1.35,-0.5) 5(-1.35,-1) 6(-0.5,-1.35) 7(0,-1.35) 8(0.5,-1.35) 9(1.35,-1) 10(1.35,-0.5) 11(1.35,0) 12(1.35,0.5) 13(1.35,1) 14(0.5,1.35) 15(0,1.35) 16(-0.5,1.35)
  Top Layer region: -1.575,1.125 -1.125,1.125 -1.125,0.875 -1.575,0.875
  Top Layer region: -1.575,0.625 -1.125,0.625 -1.125,0.375 -1.575,0.375
  Top Layer region: -1.575,0.125 -1.125,0.125 -1.125,-0.125 -1.575,-0.125
  Top Layer region: -1.575,-0.375 -1.125,-0.375 -1.125,-0.625 -1.575,-0.625
  Top Layer region: -1.575,-0.875 -1.125,-0.875 -1.125,-1.125 -1.575,-1.125
  Top Layer region: -0.625,-1.65 -0.625,-1.05 -0.375,-1.05 -0.375,-1.65
  Top Layer region: -0.125,-1.65 -0.125,-1.05 0.125,-1.05 0.125,-1.65
  Top Layer region: 0.375,-1.65 0.375,-1.05 0.625,-1.05 0.625,-1.65
  Top Layer region: 1.65,-1.125 1.05,-1.125 1.05,-0.875 1.65,-0.875
  Top Layer region: 1.65,-0.625 1.05,-0.625 1.05,-0.375 1.65,-0.375
  Top Layer region: 1.65,-0.125 1.05,-0.125 1.05,0.125 1.65,0.125
  Top Layer region: 1.65,0.375 1.05,0.375 1.05,0.625 1.65,0.625
  Top Layer region: 1.65,0.875 1.05,0.875 1.05,1.125 1.65,1.125
  Top Layer region: 0.625,1.575 0.625,1.125 0.375,1.125 0.375,1.575
  Top Layer region: 0.125,1.575 0.125,1.125 -0.125,1.125 -0.125,1.575
  Top Layer region: -0.375,1.575 -0.375,1.125 -0.625,1.125 -0.625,1.575
  silkscreen extent -1.98,-1.5 1.5,1.5
"QWIIC CONNECTOR" [mm]
  rect 0.6x1.55 smd: 1(-1.2,0.8) 2(-0.2,0.8) 3(0.8,0.8) 4(1.8,0.8)
  rect 1.2x2 smd: 5(3.1,-3.1) 6(-2.5,-3.1)
  silkscreen extent -2.9,-3.9 3.6,0.3
R0603#1 [mm]
  rect 1x1.1 smd: 1(-0.8,0) 2(0.8,0)
  silkscreen extent -1.55,-0.8 1.55,0.81
R0603#2 [mm]
  round 0 smd: 1(-0.7,0) 2(0.7,0)
  Top Layer region: 0.3,0.45 1.1,0.45 1.1,-0.45 0.3,-0.45
  Top Layer region: -1.1,0.45 -0.3,0.45 -0.3,-0.45 -1.1,-0.45
  silkscreen extent -1.4,-0.75 1.4,0.76
R0603#3 [mm]
  rect 0.8x0.9 smd: 1(-0.7,0) 2(0.7,0)
  silkscreen extent -1.4,-0.75 1.4,0.76
R1206#1 [mm]
  round 0 smd: 1(-1.6,0) 2(1.6,0)
  Top Layer region: 1,0.95 2.2,0.95 2.2,-0.95 1,-0.95
  Top Layer region: -2.2,0.95 -1,0.95 -1,-0.95 -2.2,-0.95
  silkscreen extent -2.5,-1.2 2.5,1.2
R1206#2 [mm]
  rect 1.2x1.9 smd: 1(-1.6,0) 2(1.6,0)
  silkscreen extent -2.5,-1.2 2.5,1.2
RES-SMD_L3.5-W1.5#1 [mm]
  rect 1.2x1.6 smd: 1(-1.5,0) 2(1.5,0)
  silkscreen extent -2.41,-1.14 2.41,1.14
RES-SMD_L3.5-W1.5#2 [mm]
  round 0 smd: 1(-1.5,0) 2(1.5,0)
  Top Layer region: -2.1,0.8 -0.9,0.8 -0.9,-0.8 -2.1,-0.8
  Top Layer region: 0.9,0.8 2.1,0.8 2.1,-0.8 0.9,-0.8
  silkscreen extent -2.41,-1.14 2.41,1.14
"S2C-SMT 3.50/04/180G 3.5SN BK RL" [mm]
  round 2.1 hole 1.3: 1(-1.75,-1.25) 2(-1.75,1.25) 3(1.75,-1.25) 4(1.75,1.25)
  silkscreen extent -4.1,-8.1 4.1,6.9
SMA_L4.4-W2.8-LS5.4-R-RD [mm]
  rect 1.8x2 smd: 1(2.1,0) 2(-2.1,0)
  silkscreen extent -2.3,-1.4 2.3,1.4
SMC_L6.9-W5.9-LS7.9-BI [mm]
  rect 3.03x3.82 smd: 1(-3.435,0) 2(3.435,0)
  silkscreen extent -3.6,-3.11 3.6,3.11
SO-8_L4.9-W3.9-P1.27-LS5.9-BL [mm]
  round 0 smd: 1(-1.905,-2.72) 2(-0.635,-2.72) 3(0.635,-2.72) 4(1.905,-2.72) 5(1.905,2.72) 6(0.635,2.72) 7(-0.635,2.72) 8(-1.905,2.72)
  Top Layer region: -2.23,-1.945 -1.58,-1.945 -1.58,-3.495 -2.23,-3.495
  Top Layer region: -0.96,-1.945 -0.31,-1.945 -0.31,-3.495 -0.96,-3.495
  Top Layer region: 0.31,-1.945 0.96,-1.945 0.96,-3.495 0.31,-3.495
  Top Layer region: 1.58,-1.945 2.23,-1.945 2.23,-3.495 1.58,-3.495
  Top Layer region: 1.58,3.495 2.23,3.495 2.23,1.945 1.58,1.945
  Top Layer region: 0.31,3.495 0.96,3.495 0.96,1.945 0.31,1.945
  Top Layer region: -0.96,3.495 -0.31,3.495 -0.31,1.945 -0.96,1.945
  Top Layer region: -2.23,3.495 -1.58,3.495 -1.58,1.945 -2.23,1.945
  silkscreen extent -2.54,-1.61 2.6,1.63
SOIC-8_L4.9-W3.9-P1.27-LS6.0-BL [mm]
  oval 0.6x1.518 smd: 1(-1.905,-2.74) 2(-0.635,-2.74) 3(0.635,-2.74) 4(1.905,-2.74) 5(1.905,2.74) 6(0.635,2.74) 7(-0.635,2.74) 8(-1.905,2.74)
  silkscreen extent -2.86,-2.86 2.5,2
SOIC-16_L9.9-W3.9-P1.27-LS6.0-BL [mm]
  oval 0.6x1.798 smd: 1(-4.445,-2.972) 2(-3.175,-2.972) 3(-1.905,-2.972) 4(-0.635,-2.972) 5(0.635,-2.972) 6(1.905,-2.972) 7(3.175,-2.972) 8(4.445,-2.972) 9(4.445,2.972) 10(3.175,2.972) 11(1.905,2.972) 12(0.635,2.972) 13(-0.635,2.972) 14(-1.905,2.972) 15(-3.175,2.972) 16(-4.445,2.972)
  silkscreen extent -4.98,-1.85 4.98,1.83
SOP-8_L5.0-W4.0-P1.27-LS6.2-BL [mm]
  oval 0.7x1.7 smd: 1(-1.905,-3.1) 2(-0.635,-3.1) 3(0.635,-3.1) 4(1.905,-3.1) 5(1.905,3.1) 6(0.635,3.1) 7(-0.635,3.1) 8(-1.905,3.1)
  silkscreen extent -2.99,-2.71 2.6,2
SOT-23-3_L2.9-W1.6-P1.90-LS2.8-BR [mm]
  round 0 smd: 1(1.25,-0.95) 2(1.25,0.95) 3(-1.25,0)
  Top Layer region: -0.625,0.35 -0.625,-0.35 -1.875,-0.35 -1.875,0.35
  Top Layer region: 1.875,1.3 1.875,0.6 0.625,0.6 0.625,1.3
  Top Layer region: 1.875,-0.6 1.875,-1.3 0.625,-1.3 0.625,-0.6
  silkscreen extent -0.65,-1.46 0.9,1.46
SOT-23-6_L2.9-W1.6-P0.95-LS2.8-BL [mm]
  rect 0.55x1 smd: 1(-0.95,-1.4) 2(0,-1.4) 3(0.95,-1.4) 4(0.95,1.4) 5(0,1.4) 6(-0.95,1.4)
  silkscreen extent -1.78,-1.52 1.55,0.9
SOT-23_L2.9-W1.3-P0.95-LS2.4-BR#1 [mm]
  round 0 smd: 1(1.2,-0.95) 2(1.2,0.95) 3(-1.2,0)
  Top Layer region: 1.85,0.65 0.55,0.65 0.55,1.25 1.85,1.25
  Top Layer region: -0.55,-0.3 -1.85,-0.3 -1.85,0.3 -0.55,0.3
  Top Layer region: 1.85,-1.25 0.55,-1.25 0.55,-0.65 1.85,-0.65
  silkscreen extent -0.7,-1.5 0.7,1.5
SOT-23_L2.9-W1.3-P0.95-LS2.4-BR#2 [mm]
  rect 1.3x0.6 smd: 1(1.2,-0.95) 2(1.2,0.95) 3(-1.2,0)
  silkscreen extent -0.7,-1.5 0.7,1.5
SOT-89_L4.5-W2.5-P1.50-LS4.2-BR [mm]
  oval 1.9x0.7 smd: 1(1.25,-1.5) 3(1.25,1.5)
  oval 3.5x2 smd: 2(-1.25,0)
  oval 2.1x0.7 smd: 2(1.151,0)
  silkscreen extent -1.85,-2.3 0.75,2.3
SOT-323-3_L2.0-W1.3-P1.30-LS2.1-BR [mil]
  rect 41.5x32.5 smd: 1(40,-26) 2(40,26) 3(-40,0)
  silkscreen extent -40,-68 45,37
SOT-323-3_L2.2-W1.3-P1.30-LS2.2-BR#1 [mil]
  round 0 smd: 1(40,-26) 2(40,26) 3(-40,0)
  Top Layer region: 19.25,-42.25 19.25,-9.75 60.75,-9.75 60.75,-42.25
  Top Layer region: 19.25,9.75 19.25,42.25 60.75,42.25 60.75,9.75
  Top Layer region: -60.75,-16.25 -60.75,16.25 -19.25,16.25 -19.25,-16.25
  silkscreen extent -40,-37 4,37
SOT-323-3_L2.2-W1.3-P1.30-LS2.2-BR#2 [mil]
  rect 41.5x32.5 smd: 1(40,-26) 2(40,26) 3(-40,0)
  silkscreen extent -40,-37 4,37
SSOP-28_L9.9-W3.9-P0.64-LS6.0-BL [mil]
  oval 15.75x64.06 smd: 1(-162.5,-112) 2(-137.5,-112) 3(-112.5,-112) 4(-87.5,-112) 5(-62.5,-112) 6(-37.5,-112) 7(-12.5,-112) 8(12.5,-112) 9(37.5,-112) 10(62.5,-112) 11(87.5,-112) 12(112.5,-112) 13(137.5,-112) 14(162.5,-112) 15(162.5,112) 16(137.5,112) 17(112.5,112) 18(87.5,112) 19(62.5,112) 20(37.5,112) 21(12.5,112) 22(-12.5,112) 23(-37.5,112) 24(-62.5,112) 25(-87.5,112) 26(-112.5,112) 27(-137.5,112) 28(-162.5,112)
  silkscreen extent -195,-111 195,71
TO-263-7_L10.2-W10.4-P1.27-LS14.4-B [mil]
  round 0 smd: 1(210,-150) 2(210,-100) 3(210,-50) 4(210,0) 5(210,50) 6(210,100) 7(210,150) 8(-210,0)
  Top Layer region: -22.99,206.69 -22.99,-206.69 -397.01,-206.69 -397.01,206.69
  Top Layer region: 278.9,167.72 278.9,132.28 141.1,132.28 141.1,167.72
  Top Layer region: 278.9,117.72 278.9,82.28 141.1,82.28 141.1,117.72
  Top Layer region: 278.9,67.72 278.9,32.28 141.1,32.28 141.1,67.72
  Top Layer region: 278.9,17.72 278.9,-17.72 141.1,-17.72 141.1,17.72
  Top Layer region: 278.9,-32.28 278.9,-67.72 141.1,-67.72 141.1,-32.28
  Top Layer region: 278.9,-82.28 278.9,-117.72 141.1,-117.72 141.1,-82.28
  Top Layer region: 278.9,-132.28 278.9,-167.72 141.1,-167.72 141.1,-132.28
  silkscreen extent -10,-201 123,197
TQFP-32_L7.0-W7.0-P0.80-LS9.0-BL [mm]
  oval 0.45x1.65 smd: 1(-2.817,-4.369) 2(-2.017,-4.369) 3(-1.217,-4.369) 4(-0.417,-4.369) 5(0.381,-4.369) 6(1.181,-4.369) 7(1.981,-4.369) 8(2.781,-4.369) 17(2.791,4.369) 18(1.991,4.369) 19(1.191,4.369) 20(0.391,4.369) 21(-0.406,4.369) 22(-1.207,4.369) 23(-2.007,4.369) 24(-2.807,4.369)
  oval 1.65x0.45 smd: 9(4.381,-2.804) 10(4.381,-2.004) 11(4.381,-1.204) 12(4.381,-0.404) 13(4.381,0.394) 14(4.381,1.194) 15(4.381,1.994) 16(4.381,2.794) 25(-4.381,2.804) 26(-4.381,2.004) 27(-4.381,1.204) 28(-4.381,0.404) 29(-4.381,-0.394) 30(-4.381,-1.194) 31(-4.381,-1.994) 32(-4.381,-2.794)
  silkscreen extent -3.86,-4.45 2.94,2.95
TQFP-100_14X14X05P [mm]
  oval 1.646x0.28 smd: 1(-1.6,-1.6) 2(-1.6,-2.1) 3(-1.6,-2.6) 4(-1.6,-3.1) 5(-1.6,-3.6) 6(-1.6,-4.1) 7(-1.6,-4.6) 8(-1.6,-5.1) 9(-1.6,-5.6) 10(-1.6,-6.1) 11(-1.6,-6.6) 12(-1.6,-7.1) 13(-1.6,-7.6) 14(-1.6,-8.1) 15(-1.6,-8.6) 16(-1.6,-9.1) 17(-1.6,-9.6) 18(-1.6,-10.1) 19(-1.6,-10.6) 20(-1.6,-11.1) 21(-1.6,-11.6) 22(-1.6,-12.1) 23(-1.6,-12.6) 24(-1.6,-13.1) 25(-1.6,-13.6) 51(13.6,-13.6) 52(13.6,-13.1) 53(13.6,-12.6) 54(13.6,-12.1) 55(13.6,-11.6) 56(13.6,-11.1) 57(13.6,-10.6) 58(13.6,-10.1) 59(13.6,-9.6) 60(13.6,-9.1) 61(13.6,-8.6) 62(13.6,-8.1) 63(13.6,-7.6) 64(13.6,-7.1) 65(13.6,-6.6) 66(13.6,-6.1) 67(13.6,-5.6) 68(13.6,-5.1) 69(13.6,-4.6) 70(13.6,-4.1) 71(13.6,-3.6) 72(13.6,-3.1) 73(13.6,-2.6) 74(13.6,-2.1) 75(13.6,-1.6)
  oval 0.28x1.646 smd: 26(0,-15.2) 27(0.5,-15.2) 28(1,-15.2) 29(1.5,-15.2) 30(2,-15.2) 31(2.5,-15.2) 32(3,-15.2) 33(3.5,-15.2) 34(4,-15.2) 35(4.5,-15.2) 36(5,-15.2) 37(5.5,-15.2) 38(6,-15.2) 39(6.5,-15.2) 40(7,-15.2) 41(7.5,-15.2) 42(8,-15.2) 43(8.5,-15.2) 44(9,-15.2) 45(9.5,-15.2) 46(10,-15.2) 47(10.5,-15.2) 48(11,-15.2) 49(11.5,-15.2) 50(12,-15.2) 76(12,0) 77(11.5,0) 78(11,0) 79(10.5,0) 80(10,0) 81(9.5,0) 82(9,0) 83(8.5,0) 84(8,0) 85(7.5,0) 86(7,0) 87(6.5,0) 88(6,0) 89(5.5,0) 90(5,0) 91(4.5,0) 92(4,0) 93(3.5,0) 94(3,0) 95(2.5,0) 96(2,0) 97(1.5,0) 98(1,0) 99(0.5,0) 100(0,0)
  silkscreen extent -2.15,-13.98 12.37,-0.8
USB-A-TH_USB-A-F-2 [mm]
  oval 1.2x2.6 hole 0.8 slot 2.2 at 90 deg: 0(-6.45,-3.6) 0(6.45,-3.6)
  round 2.5 hole 1.8: 1(-3.5,3.6) 4(3.5,3.6)
  round 1.6 hole 1: 2(-1,3.6) 3(1,3.6)
  silkscreen extent -7.16,-7 7.18,3.6
USB-A-TH_USB-M-51 [mm]
  round 1.7 hole 1.1: 1(-3.5,2.574) 2(-1.001,2.574) 3(1.001,2.574) 4(3.5,2.574) 5(-3.5,-0.027) 6(-1.001,-0.027) 7(1.001,-0.027) 8(3.5,-0.027)
  round 3.2 hole 2.3: 9(-6.551,-2.925) 9(-6.551,2.925) 9(6.551,-2.826) 9(6.551,2.925)
  silkscreen extent -7.52,-14.13 7.54,3.87
USB-C-SMD_KH-TYPE-C-16P#1 [mm]
  oval 1.2x2 hole 0.7 slot 1.7 at 90 deg copper offset 0,0: 1(-4.32,1.765) 2(4.32,1.765)
  oval 1.2x1.8 hole 0.7 slot 1.4 at 90 deg copper offset 0,0: 3(-4.32,-2.415)
  oval 1.2x1.8 hole 0.7 slot 1.4 at 90 deg: 4(4.32,-2.415)
  round 0 smd: A1(-3.35,2.415) A4(-2.55,2.415) A5(-1.25,2.415) A6(-0.25,2.415) A7(0.25,2.415) A8(1.25,2.415) A9(2.55,2.415) A12(3.35,2.415) B1(3.05,2.415) B4(2.25,2.415) B5(1.75,2.415) B6(0.75,2.415) B7(-0.75,2.415) B8(-1.75,2.415) B9(-2.25,2.415) B12(-3.05,2.415)
  round 0.7 hole 0.7 unplated: ""(-2.89,1.235) ""(2.89,1.235)
  Top Layer region: -3.5,3.065 -3.2,3.065 -3.2,1.765 -3.5,1.765
  Top Layer region: -3.2,3.065 -2.9,3.065 -2.9,1.765 -3.2,1.765
  Top Layer region: -2.7,3.065 -2.4,3.065 -2.4,1.765 -2.7,1.765
  Top Layer region: -2.4,3.065 -2.1,3.065 -2.1,1.765 -2.4,1.765
  Top Layer region: -1.9,3.065 -1.6,3.065 -1.6,1.765 -1.9,1.765
  Top Layer region: -1.4,3.065 -1.1,3.065 -1.1,1.765 -1.4,1.765
  Top Layer region: -0.9,3.065 -0.6,3.065 -0.6,1.765 -0.9,1.765
  Top Layer region: -0.4,3.065 -0.1,3.065 -0.1,1.765 -0.4,1.765
  Top Layer region: 0.1,3.065 0.4,3.065 0.4,1.765 0.1,1.765
  Top Layer region: 0.6,3.065 0.9,3.065 0.9,1.765 0.6,1.765
  Top Layer region: 1.1,3.065 1.4,3.065 1.4,1.765 1.1,1.765
  Top Layer region: 1.6,3.065 1.9,3.065 1.9,1.765 1.6,1.765
  Top Layer region: 2.1,3.065 2.4,3.065 2.4,1.765 2.1,1.765
  Top Layer region: 2.4,3.065 2.7,3.065 2.7,1.765 2.4,1.765
  Top Layer region: 2.9,3.065 3.2,3.065 3.2,1.765 2.9,1.765
  Top Layer region: 3.2,3.065 3.5,3.065 3.5,1.765 3.2,1.765
  silkscreen extent -4.57,-5.08 4.57,0.57
USB-C-SMD_KH-TYPE-C-16P#2 [mm]
  oval 1.2x2 hole 0.7 slot 1.7 at 90 deg copper offset 0,0: 1(-4.32,1.765) 2(4.32,1.765)
  oval 1.2x1.8 hole 0.7 slot 1.4 at 90 deg: 3(-4.32,-2.415)
  oval 1.2x1.8 hole 0.7 slot 1.4 at 90 deg copper offset 0,0: 4(4.32,-2.415)
  round 0 smd: A1(-3.35,2.415) A4(-2.55,2.415) A5(-1.25,2.415) A6(-0.25,2.415) A7(0.25,2.415) A8(1.25,2.415) A9(2.55,2.415) A12(3.35,2.415) B1(3.05,2.415) B4(2.25,2.415) B5(1.75,2.415) B6(0.75,2.415) B7(-0.75,2.415) B8(-1.75,2.415) B9(-2.25,2.415) B12(-3.05,2.415)
  round 0.7 hole 0.7 unplated: ""(-2.89,1.235) ""(2.89,1.235)
  Top Layer region: -3.5,3.065 -3.2,3.065 -3.2,1.765 -3.5,1.765
  Top Layer region: -3.2,3.065 -2.9,3.065 -2.9,1.765 -3.2,1.765
  Top Layer region: -2.7,3.065 -2.4,3.065 -2.4,1.765 -2.7,1.765
  Top Layer region: -2.4,3.065 -2.1,3.065 -2.1,1.765 -2.4,1.765
  Top Layer region: -1.9,3.065 -1.6,3.065 -1.6,1.765 -1.9,1.765
  Top Layer region: -1.4,3.065 -1.1,3.065 -1.1,1.765 -1.4,1.765
  Top Layer region: -0.9,3.065 -0.6,3.065 -0.6,1.765 -0.9,1.765
  Top Layer region: -0.4,3.065 -0.1,3.065 -0.1,1.765 -0.4,1.765
  Top Layer region: 0.1,3.065 0.4,3.065 0.4,1.765 0.1,1.765
  Top Layer region: 0.6,3.065 0.9,3.065 0.9,1.765 0.6,1.765
  Top Layer region: 1.1,3.065 1.4,3.065 1.4,1.765 1.1,1.765
  Top Layer region: 1.6,3.065 1.9,3.065 1.9,1.765 1.6,1.765
  Top Layer region: 2.1,3.065 2.4,3.065 2.4,1.765 2.1,1.765
  Top Layer region: 2.4,3.065 2.7,3.065 2.7,1.765 2.4,1.765
  Top Layer region: 2.9,3.065 3.2,3.065 3.2,1.765 2.9,1.765
  Top Layer region: 3.2,3.065 3.5,3.065 3.5,1.765 3.2,1.765
  silkscreen extent -4.57,-5.08 4.57,0.57
"WEMOS-D1 ESP32" [mm]
  round 1.6 hole 1.016: 1(0,-2.54) 2(2.54,-2.54) 3(25.4,-2.54) 4(27.94,-2.54) 5(0,-5.08) 6(2.54,-5.08) 7(25.4,-5.08) 8(27.94,-5.08) 9(0,-7.62) 10(2.54,-7.62) 11(25.4,-7.62) 12(27.94,-7.62) 13(0,-10.16) 14(2.54,-10.16) 15(25.4,-10.16) 16(27.94,-10.16) 17(0,-12.7) 18(2.54,-12.7) 19(25.4,-12.7) 20(27.94,-12.7) 21(0,-15.24) 22(2.54,-15.24) 23(25.4,-15.24) 24(27.94,-15.24) 25(0,-17.78) 26(2.54,-17.78) 27(25.4,-17.78) 28(27.94,-17.78) 29(0,-20.32) 30(2.54,-20.32) 31(25.4,-20.32) 32(27.94,-20.32) 33(0,-22.86) 34(2.54,-22.86) 35(25.4,-22.86) 36(27.94,-22.86) 37(0,-25.4) 38(25.4,-25.4) 39(2.54,-25.4) 40(27.94,-25.4)
  silkscreen extent -2.59,-35.16 30.53,5.08

## Free pads (board coordinates)
  round 0 hole 2 slot 44 at 90 deg unplated: 1(190.887,65.066) 1(190.887,110.066)
  round 0 hole 2 slot 8 at 0 deg unplated: 1(197.487,90.866)
  round 3.2 hole 3.2 unplated: ""(67.087,44.666) ""(67.087,130.166) ""(67.087,130.166) ""(154.587,44.366) ""(154.587,118.566) ""(159.937,104.266) ""(176.587,82.666) ""(176.587,117.166)

## Via types
v1: diameter 0.6, hole 0.3, Top Layer to Bottom Layer, 420 vias
v2: diameter 0.61, hole 0.305, Top Layer to Bottom Layer, 1 vias

## Nets (pads, with @x,y where several pads share a name; then routed paths per layer and width w, separated by ;. In a path a pad name is that pad's centre, name@x,y a point inside that pad or via, vN(x,y) a via of type N, cw(c..) or ccw(c..) an arc to the next point about the centre after c; other vN are vias at no path point)
1V8HUB: C12.2 U2.12 U2.28 | length 14.8
  Top Layer w0.3: U2.28@95.442,53.938 96.115,53.938 96.988,53.066 96.988,52.167 97.288,51.867 C12.2@97.287,51.666 97.587,51.966 97.587,54.666 99.287,56.366 v1(99.287,57.566) ; v1@99.787,60.466 100.245,60.923 U2.12@101.132,60.923
  Bottom Layer w0.3: v1(99.287,57.566) 99.287,59.966 v1@99.787,60.466
  other v1: 99.787,60.466
3V3HUB: C10.2 Q7.3 R2.2 R34.2 U2.13 U2.19 U2.21 U2.26 U14.8 | length 56.6
  Top Layer w0.145: v1(89.087,47.716) v1(92.737,47.716) ; 90.686,61.765 90.686,61.465 90.087,61.465 89.736,61.115 89.736,60.117 89.889,59.967 Q7.3@92.553,59.966 ; v1(90.687,51.766) R2.2@90.687,53.066 ; v1(93.937,47.716) 96.137,47.716 96.437,47.417 96.437,46.916 95.987,46.467 94.488,46.467 93.988,45.966 93.988,45.415 94.842,44.562 U14.8@95.286,44.562
  Top Layer w0.15: R2.2@90.687,53.066 91.486,53.866 92.637,53.866 93.98,55.209 U2.26@95.442,55.208
  Top Layer w0.3: Q7.3@92.553,59.966 92.916,59.603 96.486,59.603 ; U2.26@95.442,55.208 96.13,55.208 96.587,55.666 ; U2.26@95.442,55.208 96.132,55.209 96.388,55.466 96.587,55.667 96.587,58.166 ; U2.21@95.443,58.333 96.987,58.266 97.287,58.611 97.287,59.221 96.9,59.603 U2.19@95.443,59.603 ; U2.19@95.442,59.653 96.874,59.654 97.186,59.964 v1@97.186,61.765 ; U2.13@101.132,61.558 100.195,61.558 v1(99.887,61.866) 99.887,62.366 100.287,62.766 102.586,62.766 103.587,63.767 C10.2@103.587,63.966
  Bottom Layer w0.145: v1@90.686,51.765 89.089,50.165 v1(89.087,47.716) ; v1(92.737,47.716) v1(93.937,47.716) ; v1(89.087,47.716) v1(89.087,47.716)
  Bottom Layer w0.3: v1(97.187,61.766) 97.287,61.866 v1(99.887,61.866)
5V_1: 5V.1 R70.2 | length 1.3
  Top Layer w0.145: 5V.1@99.737,91.266 R70.2@101.087,91.266
+3V3: C15.1 C36.1 C41.2 C42.2 C43.2 C45.2 C46.2 C47.2 C48.2 C49.2 C50.2 C51.2 C52.1 C54.2 CN6.1 CN15.1 QWIIC.2 R29.2 R30.2 R37.2 R78.1 R79.1 RX485.2 RXCAN1.2 RXCAN.2 TX485.2 TXCAN1.2 TXCAN.2 U1.30 U7.5 U8.8 U11.1 U11.10 U11.11 U11.21 U11.31 U11.32 U11.33 U11.45 U11.50 U11.54 U11.75 U11.76 U11.99 U12.5 U13.1 U18.1 U18.14 | length 283.8
  Top Layer w0.145: R79.1@81.486,69.967 80.686,69.967 80.386,69.667 80.386,67.866 84.186,64.066 84.186,63.767 85.286,62.667 89.289,62.667 90.313,63.691 CN6.1@91.437,63.691 92.512,63.691 93.287,64.465 93.287,68.166 v1(93.387,68.166) ; R79.1@81.487,69.966 R78.1@82.987,69.966 ; C51.2@101.987,73.766 U11.21@103.787,73.766 ; C49.2@102.087,79.266 U11.10@103.787,79.266 ; C47.2@102.087,83.766 U11.1@103.787,83.766 104.987,83.766 105.887,84.666 U11.99@105.887,85.366 ; C49.2@102.587,78.766 U11.11@103.787,78.766 ; U11.21@103.787,73.766 104.986,73.767 107.887,70.866 U11.31@107.887,70.166 ; U11.99@105.887,85.366 C46.2@105.887,87.166 ; U11.31@107.887,70.166 107.887,69.366 C54.2@108.887,68.366 108.387,68.866 U11.32@108.387,70.166 v1(108.387,71.466) ; C54.2@108.887,68.366 U11.33@108.887,70.166 ; C50.2@114.987,68.366 114.887,68.466 U11.45@114.887,70.166 114.887,70.866 117.287,73.266 U11.54@118.987,73.266 C41.2@120.987,73.266 v1(120.287,73.966) ; 116.289,72.267 116.387,72.166 117.387,71.166 U11.50@117.387,70.166 117.387,68.966 ; C43.2@117.287,87.066 117.387,86.966 U11.76@117.387,85.366 117.387,84.666 118.287,83.766 U11.75@118.987,83.766 C42.2@120.787,83.766 ; C42.2@120.787,83.766 121.138,84.117 121.138,84.615 122.787,86.266 124.887,86.266 125.459,85.695 127.409,85.695 RXCAN1.2@128.137,84.966 ; TXCAN1.2@128.137,83.466 RXCAN1.2@128.137,84.966 ; C15.1@129.287,59.866 128.987,59.565 128.987,58.816 ; U18.14@130.089,58.816 128.987,58.816 ; U18.1@130.439,56.966 130.439,56.166 129.887,56.166 v1(129.087,56.966) 128.987,57.066 128.987,58.816 ; R29.2@135.987,55.666 R30.2@135.987,57.866 ; C48.2@165.187,95.066 165.187,95.855 165.187,96.622 U7.5@165.227,96.661 ; TXCAN.2@174.437,98.566 RXCAN.2@174.437,100.066 ; RX485.2@176.037,76.566 TX485.2@176.037,78.066
  Top Layer w0.2: U12.5@128.527,77.361 128.637,77.251 v1(128.637,74.966) ; U8.8@145.182,89.786 145.182,89.07 145.888,88.367 146.487,88.367 149.688,85.166 149.688,82.865 v1(153.187,79.366) 153.462,79.642 159.462,79.642 160.437,78.666 v1(160.587,78.666) 162.662,76.591 166.358,76.591 166.52,76.429 169.848,76.429 170.013,76.591 171.014,76.591 173.686,79.266 174.989,79.266 176.038,78.217 TX485.2@176.037,78.066
  Top Layer w0.3: v1(124.387,67.166) 127.336,67.165 129.838,69.667 139.088,69.667 139.787,70.366 146.388,70.366 147.237,71.214 v1(147.237,72.866) ; CN15.1@127.087,56.996 129.057,56.996 v1(129.087,56.966) ; U8.8@145.182,89.786 145.187,92.365 147.689,94.866 161.633,94.866 162.233,94.267 164.488,94.267 165.088,94.866 170.988,94.866 174.438,98.316 TXCAN.2@174.437,98.566
  Top Layer w0.5: 116.887,72.266 v1(118.987,70.166) ; QWIIC.2@123.787,48.816 v1(123.787,51.816) ; v1(124.387,63.566) 124.387,61.866 124.587,61.666
  Top Layer w0.8: C52.1@124.587,62.166 124.587,59.496 CN15.1@127.087,56.996
  Bottom Layer w0.145: v1(93.387,68.166) 93.387,69.765 93.688,70.066 93.793,70.165 103.066,70.165 103.368,69.865 ; 103.386,69.865 106.487,69.865 107.987,71.366 v1(108.387,71.466) ; v1(120.287,73.966) 127.635,73.965 v1@128.636,74.966
  Bottom Layer w0.3: v1(129.087,56.966) 135.787,56.966 v1(135.987,56.766) ; v1(147.237,72.866) 153.188,78.816 v1(153.187,79.366) ; 160.587,74.267 160.587,72.466 161.247,71.806 162.749,71.806 164.029,70.526 U1.30@164.366,70.526 ; 160.587,74.267 v1(160.587,78.666)
  Bottom Layer w0.5: v1(123.787,51.816) 123.787,53.696 CN15.1@127.087,56.996 ; v1(124.387,63.566) 124.087,63.866 124.087,66.866 v1(124.387,67.166)
  Bottom Layer w0.6: v1(118.987,70.166) 121.387,70.166 v1(124.387,67.166)